# EAGLE board cpc_cpucard (EAGLE 6.4)
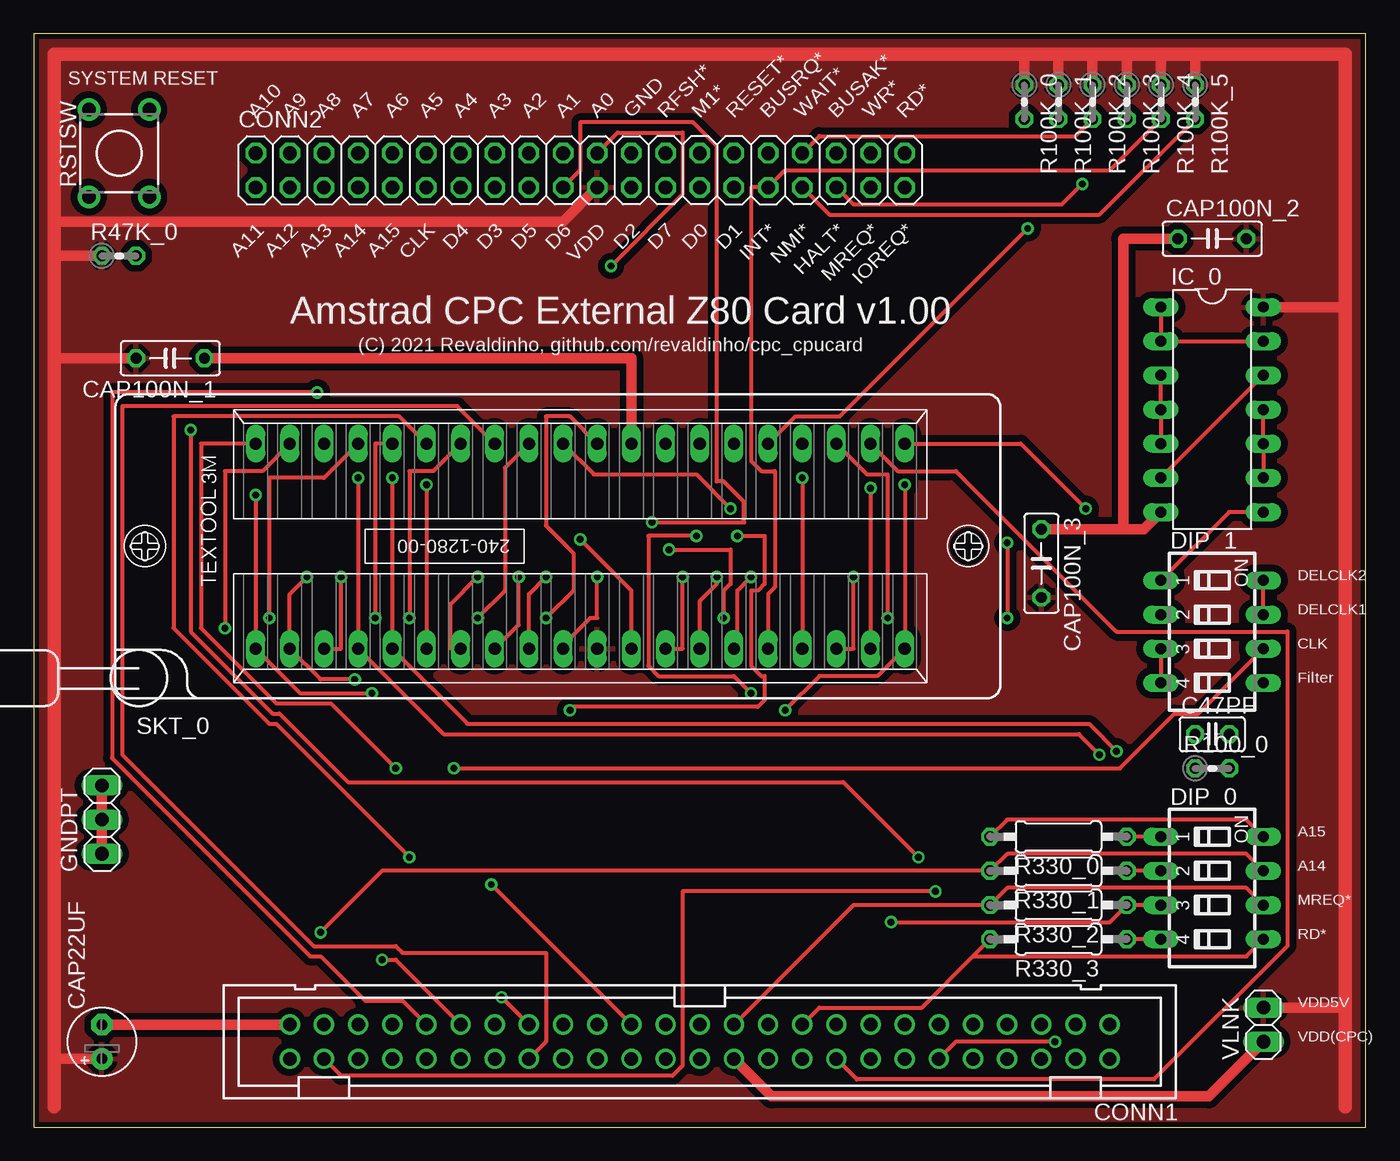
[diagram p0: board, top side]
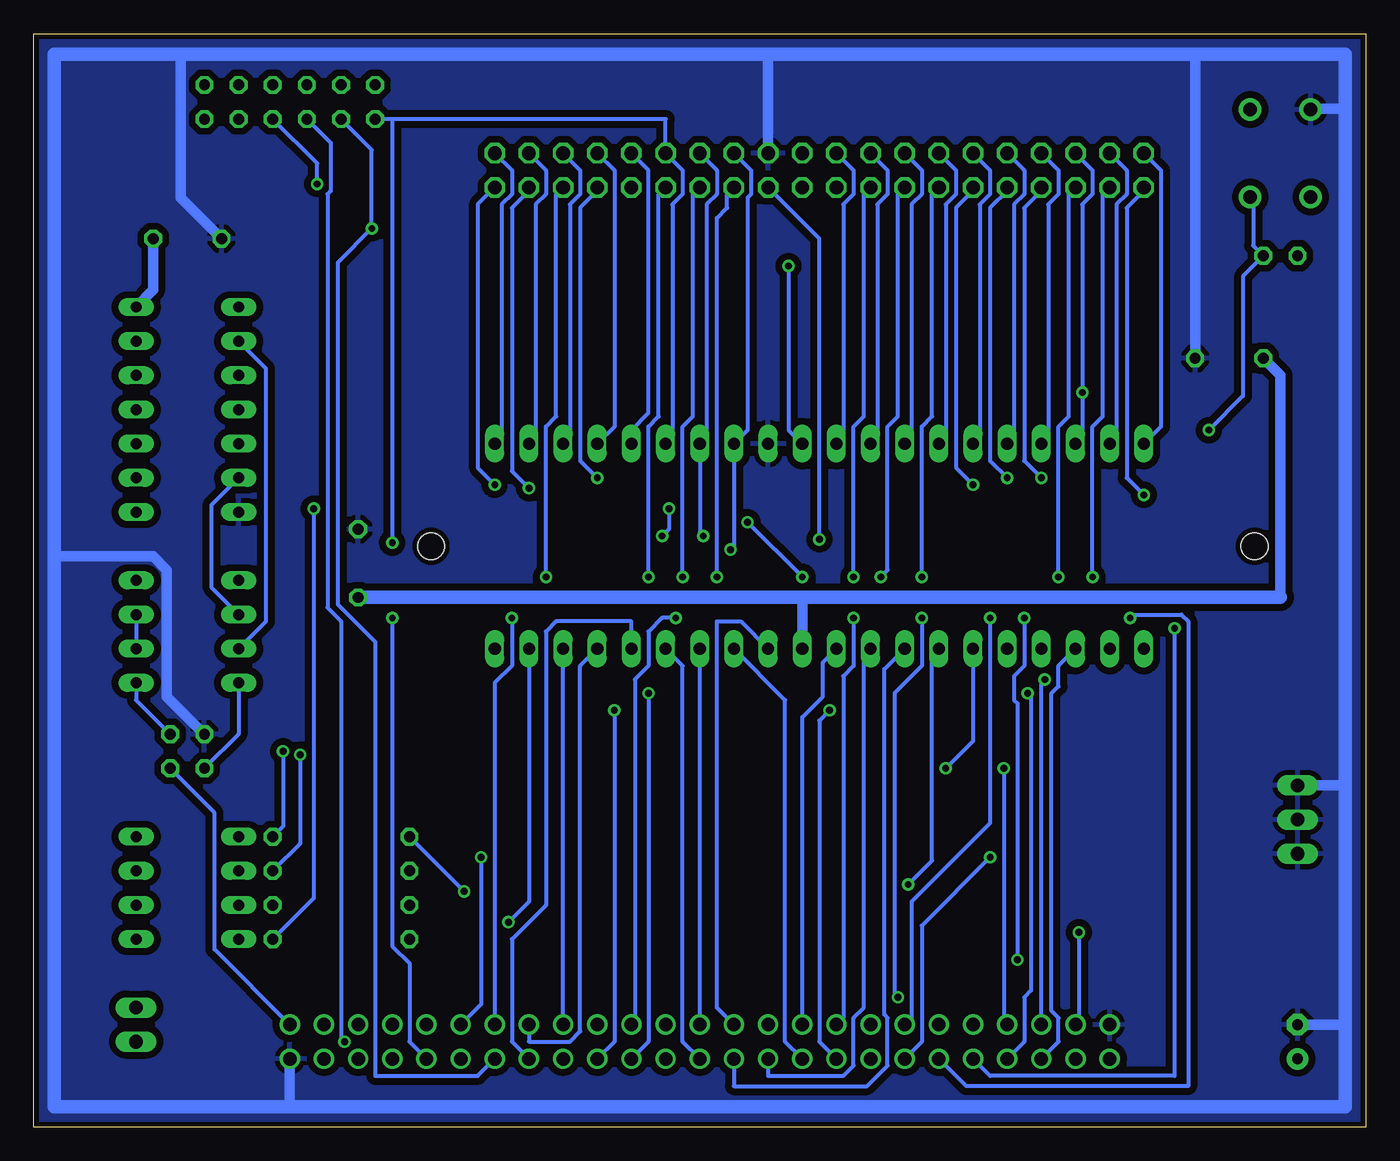
[diagram p1: board, bottom side, seen from below]

Size 99.06 x 81.28 mm. Coordinates in mm from the lower left corner, seen from the top.
Outline: 0,0 99.06,0 99.06,81.28 0,81.28 0,0
Copper layers (1*16): Top 0.035mm / dielectric 1.5mm / Bottom 0.035mm
Design rules "design_rules": minimum track width 10mil, minimum drill 20mil, track to track 10mil, track to pad 10mil, pad to pad 12mil, via to via 12mil, smd to smd 8mil, copper to edge 15mil, drill to drill 8mil, minimum pad ring 10mil, minimum via ring 8mil, stop-mask expansion 4mil, vias tented up to drill 0mil, thermal gap 15mil
Net classes: 0 signal: width 0.305 mm, clearance 0.305 mm; 1 supply: width 0.762 mm, clearance 0.508 mm

## Footprints (pad centres in the part's own frame; a part is rotated, then mirrored left to right if it is on the bottom)
C025-025X050 = drill 0.813 octagon: 1 -1.27,0; 2 1.27,0
E2,5-5 = drill 0.813 pad 1.6: + -1.27,0 | drill 0.813 pad 1.6 octagon: - 1.27,0
C050-025X075 = drill 0.813 octagon: 1 -2.54,0; 2 2.54,0
PAK100/2500-50 = drill 1 pad 1.422: 1 -30.48,-1.27; 2 -30.48,1.27; 3 -27.94,-1.27; 4 -27.94,1.27; 5 -25.4,-1.27; 6 -25.4,1.27; 7 -22.86,-1.27; 8 -22.86,1.27; 9 -20.32,-1.27; 10 -20.32,1.27; 11 -17.78,-1.27; 12 -17.78,1.27; 13 -15.24,-1.27; 14 -15.24,1.27; 15 -12.7,-1.27; 16 -12.7,1.27; 17 -10.16,-1.27; 18 -10.16,1.27; 19 -7.62,-1.27; 20 -7.62,1.27; 21 -5.08,-1.27; 22 -5.08,1.27; 23 -2.54,-1.27; 24 -2.54,1.27; 25 0,-1.27; 26 0,1.27; 27 2.54,-1.27; 28 2.54,1.27; 29 5.08,-1.27; 30 5.08,1.27; 31 7.62,-1.27; 32 7.62,1.27; 33 10.16,-1.27; 34 10.16,1.27; 35 12.7,-1.27; 36 12.7,1.27; 37 15.24,-1.27; 38 15.24,1.27; 39 17.78,-1.27; 40 17.78,1.27; 41 20.32,-1.27; 42 20.32,1.27; 43 22.86,-1.27; 44 22.86,1.27; 45 25.4,-1.27; 46 25.4,1.27; 47 27.94,-1.27; 48 27.94,1.27; 49 30.48,-1.27; 50 30.48,1.27
2X20 = drill 1.016 octagon: 1 -24.13,-1.27; 2 -24.13,1.27; 3 -21.59,-1.27; 4 -21.59,1.27; 5 -19.05,-1.27; 6 -19.05,1.27; 7 -16.51,-1.27; 8 -16.51,1.27; 9 -13.97,-1.27; 10 -13.97,1.27; 11 -11.43,-1.27; 12 -11.43,1.27; 13 -8.89,-1.27; 14 -8.89,1.27; 15 -6.35,-1.27; 16 -6.35,1.27; 17 -3.81,-1.27; 18 -3.81,1.27; 19 -1.27,-1.27; 20 -1.27,1.27; 21 1.27,-1.27; 22 1.27,1.27; 23 3.81,-1.27; 24 3.81,1.27; 25 6.35,-1.27; 26 6.35,1.27; 27 8.89,-1.27; 28 8.89,1.27; 29 11.43,-1.27; 30 11.43,1.27; 31 13.97,-1.27; 32 13.97,1.27; 33 16.51,-1.27; 34 16.51,1.27; 35 19.05,-1.27; 36 19.05,1.27; 37 21.59,-1.27; 38 21.59,1.27; 39 24.13,-1.27; 40 24.13,1.27
SD4-04 = drill 0.813 long: 1 -3.81,-3.81; 2 -1.27,-3.81; 3 1.27,-3.81; 4 3.81,-3.81; 5 3.81,3.81; 6 1.27,3.81; 7 -1.27,3.81; 8 -3.81,3.81
1X03 = drill 1.016 long: 1 -2.54,0; 2 0,0; 3 2.54,0
DIL14 = drill 0.813 long: 1 -7.62,-3.81; 2 -5.08,-3.81; 3 -2.54,-3.81; 4 0,-3.81; 5 2.54,-3.81; 6 5.08,-3.81; 7 7.62,-3.81; 8 7.62,3.81; 9 5.08,3.81; 10 2.54,3.81; 11 0,3.81; 12 -2.54,3.81; 13 -5.08,3.81; 14 -7.62,3.81
0204V = drill 0.813 octagon: 1 -1.27,0; 2 1.27,0
0207/10 = drill 0.813 octagon: 1 -5.08,0; 2 5.08,0
TL1105 = drill 1 pad 1.676: 1 -2.25,3.25; 2 2.25,3.25; 3 -2.25,-3.25; 4 2.25,-3.25
240-1280-00-0602J = drill 0.9 long: 1 -24.13,-7.62; 2 -21.59,-7.62; 3 -19.05,-7.62; 4 -16.51,-7.62; 5 -13.97,-7.62; 6 -11.43,-7.62; 7 -8.89,-7.62; 8 -6.35,-7.62; 9 -3.81,-7.62; 10 -1.27,-7.62; 11 1.27,-7.62; 12 3.81,-7.62; 13 6.35,-7.62; 14 8.89,-7.62; 15 11.43,-7.62; 16 13.97,-7.62; 17 16.51,-7.62; 18 19.05,-7.62; 19 21.59,-7.62; 20 24.13,-7.62; 21 24.13,7.62; 22 21.59,7.62; 23 19.05,7.62; 24 16.51,7.62; 25 13.97,7.62; 26 11.43,7.62; 27 8.89,7.62; 28 6.35,7.62; 29 3.81,7.62; 30 1.27,7.62; 31 -1.27,7.62; 32 -3.81,7.62; 33 -6.35,7.62; 34 -8.89,7.62; 35 -11.43,7.62; 36 -13.97,7.62; 37 -16.51,7.62; 38 -19.05,7.62; 39 -21.59,7.62; 40 -24.13,7.62 | hole 2: 28.86,0; -32.36,0
1X02 = drill 1.016 long: 1 -1.27,0; 2 1.27,0

## Placement (x,y rotation side)
C47PF  [C025-025X050]  87.63,29.21 0 top
CAP22UF  [E2,5-5]  5.08,6.35 90 top
CAP100N_1  [C050-025X075]  10.16,57.15 180 top
CAP100N_2  [C050-025X075]  87.63,66.04 0 top
CAP100N_3  [C050-025X075]  74.93,41.91 270 top
CONN1  [PAK100/2500-50]  49.53,6.35 180 top
CONN2  [2X20]  40.64,71.12 0 top
DIP_0  [SD4-04]  87.63,17.78 270 top
DIP_1  [SD4-04]  87.63,36.83 270 top
GNDPT  [1X03]  5.08,22.86 90 top
IC_0  [DIL14]  87.63,53.34 270 top
R47K_0  [0204V]  6.35,64.77 0 top
R100_0  [0204V]  87.63,26.67 0 top
R100K_0  [0204V]  73.66,76.2 270 top
R100K_1  [0204V]  76.2,76.2 270 top
R100K_2  [0204V]  78.74,76.2 270 top
R100K_3  [0204V]  81.28,76.2 270 top
R100K_4  [0204V]  83.82,76.2 270 top
R100K_5  [0204V]  86.36,76.2 270 top
R330_0  [0207/10]  76.2,21.59 180 top
R330_1  [0207/10]  76.2,19.05 180 top
R330_2  [0207/10]  76.2,16.51 180 top
R330_3  [0207/10]  76.2,13.97 180 top
RSTSW  [TL1105]  6.35,72.39 0 top
SKT_0  [240-1280-00-0602J]  40.64,43.18 0 top
VLNK  [1X02]  91.44,7.62 90 top

## Library data of the parts
C47PF CAP22UF CAP100N_1-CAP100N_3 R47K_0 R100_0 R100K_0 R100K_1-R100K_5 R330_0 R330_1-R330_3 = resistor
CONN1 SKT_0 = con-3m
CONN2 GNDPT VLNK = pinhead
DIP_0 DIP_1 = switch-dil
IC_0 = ic-package
RSTSW = switch

## Nets
A0: CONN1.33 CONN2.22 SKT_0.30
A1: CONN1.34 CONN2.20 SKT_0.31
A2: CONN1.35 CONN2.18 SKT_0.32
A3: CONN1.36 CONN2.16 SKT_0.33
A4: CONN1.37 CONN2.14 SKT_0.34
A5: CONN1.38 CONN2.12 SKT_0.35
A6: CONN1.39 CONN2.10 SKT_0.36
A7: CONN1.40 CONN2.8 SKT_0.37
A8: CONN1.41 CONN2.6 SKT_0.38
A9: CONN1.42 CONN2.4 SKT_0.39
A10: CONN1.43 CONN2.2 SKT_0.40
A11: CONN1.44 CONN2.1 SKT_0.1
A12: CONN1.45 CONN2.3 SKT_0.2
A13: CONN1.46 CONN2.5 SKT_0.3
A14: CONN1.47 DIP_0.7 R330_1.2
A15: CONN1.48 DIP_0.8 R330_0.2
BUSACK_B: CONN1.13 CONN2.36 SKT_0.23
BUSRESET_B: CONN1.11 R47K_0.2 RSTSW.4
BUSRQ_B: CONN1.14 CONN2.32 R100K_1.2 SKT_0.25
CLK: CONN1.1 R100_0.2
CLK1: DIP_1.2 IC_0.6 IC_0.12
CLK2_B: IC_0.9 IC_0.10 IC_0.11
CLK3: DIP_1.1 IC_0.8
CLK_B: IC_0.3 IC_0.4 IC_0.5
CLK_CAP: C47PF.2 DIP_1.5
CLK_FILT: DIP_1.3 DIP_1.4 IC_0.1 IC_0.2 IC_0.13 R100_0.1
CURSOR: CONN1.5
D0: CONN1.25 CONN2.27 SKT_0.14
D1: CONN1.26 CONN2.29 SKT_0.15
D2: CONN1.27 CONN2.23 SKT_0.12
D3: CONN1.28 CONN2.15 SKT_0.8
D4: CONN1.29 CONN2.13 SKT_0.7
D5: CONN1.30 CONN2.17 SKT_0.9
D6: CONN1.31 CONN2.19 SKT_0.10
D7: CONN1.32 CONN2.25 SKT_0.13
EXP_B: CONN1.3
GND [supply]: C47PF.1 CAP22UF.- CAP100N_1.1 CAP100N_2.1 CAP100N_3.1 CONN1.2 CONN1.49 CONN2.24 GNDPT.1 GNDPT.2 GNDPT.3 IC_0.7 RSTSW.1 SKT_0.29
HALT_B: CONN1.17 CONN2.35 R100K_3.2 SKT_0.18
INT_B: CONN1.16 CONN2.31 R100K_4.2 SKT_0.16
IOREQ_B: CONN1.20 CONN2.39 SKT_0.20
LPEN: CONN1.4
M1_B: CONN1.22 CONN2.28 SKT_0.27
MREQ_B: CONN1.23 DIP_0.6 R330_2.2
NMI_B: CONN1.15 CONN2.33 R100K_5.2 SKT_0.17
RAMDIS: CONN1.6
RAMRD_B: CONN1.7
RD_B: CONN1.19 DIP_0.5 R330_3.2
READY: CONN1.12 CONN2.34 R100K_2.2 SKT_0.24
RESET_B: CONN1.10 CONN2.30 R100K_0.2 SKT_0.26
RFSH_B: CONN1.21 CONN2.26 SKT_0.28
ROMDIS: CONN1.8
ROMEN_B: CONN1.9
SOUND: CONN1.50
VDD [supply]: CONN1.24 VLNK.1
VDD5V [supply]: CAP22UF.+ CAP100N_1.2 CAP100N_2.2 CAP100N_3.2 CONN2.21 IC_0.14 R47K_0.1 R100K_0.1 R100K_1.1 R100K_2.1 R100K_3.1 R100K_4.1 R100K_5.1 SKT_0.11 VLNK.2
WR_B: CONN1.18 CONN2.38 SKT_0.22
ZIF_A14: CONN2.7 DIP_0.2 R330_1.1 SKT_0.4
ZIF_A15: CONN2.9 DIP_0.1 R330_0.1 SKT_0.5
ZIF_CLK: CONN2.11 DIP_1.6 DIP_1.7 DIP_1.8 SKT_0.6
ZIF_MREQ_B: CONN2.37 DIP_0.3 R330_2.1 SKT_0.19
ZIF_RD_B: CONN2.40 DIP_0.4 R330_3.1 SKT_0.21

## Tracks (layer width: path | path; a pad name or v marks a point on that pad's centre or on a via)
A0  (via drill 0.51)
  Top 0.305: v42.93,64.01 48.26,69.34 48.26,73.91 43.43,73.91 CONN2.22 | v38.1,37.85 40.13,39.88 40.13,42.67 38.1,44.7 38.1,52.83 39.88,52.83 SKT_0.30
  Bottom 0.305: SKT_0.30 42.93,51.82 v42.93,64.01 | CONN1.33 38.86,8.13 38.86,33.53 38.1,34.29 v38.1,37.85
A1  (via drill 0.51)
  Top 0.305: v39.88,30.99 40.13,31.24 53.85,31.24 54.36,31.75 54.36,33.53 54.1,33.53 53.34,34.29 53.34,39.88 53.85,39.88 54.36,40.39 54.36,43.94 v52.32,43.94 | v51.82,45.97 49.28,48.51 41.66,48.51 SKT_0.31
  Bottom 0.305: SKT_0.31 38.86,51.31 38.86,68.58 38.1,69.34 38.1,71.12 CONN2.20 | CONN1.34 40.64,6.35 40.64,30.23 v39.88,30.99 | v52.32,43.94 51.82,44.45 v51.82,45.97
A2  (via drill 0.51)
  Top 0.305: v34.8,9.65 CONN1.35 | v33.02,37.85 35.05,39.88 35.05,49.02 SKT_0.32
  Bottom 0.305: SKT_0.32 36.32,51.31 36.32,68.58 35.56,69.34 35.56,71.12 CONN2.18 | v34.8,9.65 35.05,9.91 35.05,32.26 33.02,34.29 v33.02,37.85
A3
  Top 0.305: CONN1.36 38.1,6.35 38.1,12.95 27.43,12.95 26.92,13.46 20.83,13.46 6.6,27.69 6.6,53.59 31.5,53.59 SKT_0.33
  Bottom 0.305: SKT_0.33 33.78,51.31 33.78,68.58 33.02,69.34 33.02,71.12 CONN2.16
A4  (via drill 0.51)
  Top 0.305: v27.94,37.85 27.94,48.77 29.72,48.77 SKT_0.34
  Bottom 0.305: SKT_0.34 31.24,51.31 31.24,68.58 30.48,69.34 30.48,71.12 CONN2.14 | CONN1.37 33.78,8.13 33.78,16.76 27.94,22.61 v27.94,37.85
A5  (via drill 0.51)
  Top 0.305: v27.94,20.07 18.03,29.97 17.53,29.97 10.41,37.08 10.41,52.83 27.18,52.83 SKT_0.35
  Bottom 0.305: SKT_0.35 28.7,51.31 28.7,68.58 27.94,69.34 27.94,71.12 CONN2.12 | CONN1.38 33.02,6.35 33.02,14.99 v27.94,20.07
A6  (via drill 0.51)
  Top 0.305: CONN1.39 26.92,12.45 v25.91,12.45 | v25.4,37.85 25.4,50.8 SKT_0.36
  Bottom 0.305: SKT_0.36 26.16,51.31 26.16,68.58 25.4,69.34 25.4,71.12 CONN2.10 | v25.91,12.45 25.91,31.5 26.16,31.75 26.16,33.53 25.4,34.29 v25.4,37.85
A7  (via drill 0.51)
  Top 0.305: v17.53,37.85 17.53,48.26 21.59,48.26 SKT_0.37
  Bottom 0.305: SKT_0.37 23.62,51.31 23.62,68.58 22.86,69.34 22.86,71.12 CONN2.8 | CONN1.40 29.72,3.05 13.21,3.05 13.21,37.59 13.72,38.1 17.53,38.1 v17.53,37.85
A8  (via drill 0.51)
  Top 0.305: CONN1.41 27.43,9.4 24.64,9.4 21.34,12.7 20.57,12.7 5.84,27.43 5.84,54.61 v21.08,54.61
  Bottom 0.305: SKT_0.38 21.08,51.31 v21.08,54.61 21.08,68.58 20.32,69.34 20.32,71.12 CONN2.6
A9  (via drill 0.51)
  Top 0.305: v14.22,37.08 14.22,48.77 17.02,48.77 SKT_0.39
  Bottom 0.305: SKT_0.39 18.54,51.31 18.54,68.58 17.78,69.34 17.78,71.12 CONN2.4 | CONN1.42 27.94,3.81 14.22,3.81 v14.22,37.08
A10  (via drill 0.51)
  Top 0.305: v26.92,26.67 22.1,31.5 18.03,31.5 12.45,37.08 12.45,50.8 SKT_0.40
  Bottom 0.305: SKT_0.40 15.24,52.07 15.24,71.12 CONN2.2 | CONN1.43 26.92,7.87 v26.92,26.67
A11  (via drill 0.51)
  Top 0.305: v16.51,46.99 SKT_0.1 19.81,32.26 v25.15,32.26
  Bottom 0.305: v16.51,46.99 17.78,48.26 17.78,68.33 16.51,69.6 CONN2.1 | CONN1.44 25.4,6.35 25.4,9.65 24.89,10.16 24.89,32 v25.15,32.26
A12  (via drill 0.51)
  Top 0.305: v23.88,33.27 21.34,33.27 SKT_0.2 19.05,39.62 v20.32,40.89
  Bottom 0.305: v23.88,33.27 24.13,33.02 CONN1.45 | CONN2.3 19.56,69.34 19.56,52.83 20.32,52.07 v20.32,40.89
A13  (via drill 0.51)
  Top 0.305: v22.86,40.89 22.86,35.56 SKT_0.3
  Bottom 0.305: SKT_0.3 22.86,34.29 22.86,32.77 23.37,32.26 23.37,8.64 22.86,8.13 22.86,6.35 CONN1.46 | CONN2.5 22.1,69.34 22.1,52.83 22.86,52.07 v22.86,40.89
A14  (via drill 0.51)
  Top 0.305: DIP_0.7 90.17,20.32 72.39,20.32 R330_1.2 25.91,19.05 v21.34,14.48
  Bottom 0.305: CONN1.47 21.34,7.87 v21.34,14.48
A15  (via drill 0.51)
  Top 0.305: R330_0.2 72.39,22.86 90.17,22.86 DIP_0.8 | CONN1.48 22.86,3.81 47.5,3.81 48.26,4.57 48.26,17.53 v67.06,17.53
  Bottom 0.305: R330_0.2 v67.06,17.53
BUSACK_B  (via drill 0.51)
  Top 0.305: v63.5,37.85 63.5,48.51 61.98,48.51 SKT_0.23
  Bottom 0.305: SKT_0.23 59.18,51.31 59.18,68.58 58.42,69.34 58.42,71.12 CONN2.36 | CONN1.13 64.77,33.02 63.5,34.29 v63.5,37.85
BUSRESET_B  (via drill 0.51)
  Top 0.305: v65.79,20.07 60.2,25.65 23.37,25.65 18.29,30.73 17.78,30.73 11.68,36.83 v11.68,51.82
  Bottom 0.305: RSTSW.4 8.38,69.09 8.38,65.53 R47K_0.2 9.14,63.25 9.14,54.36 v11.68,51.82 | CONN1.11 65.79,9.14 v65.79,20.07
BUSRQ_B  (via drill 0.51)
  Top 0.305: v73.91,66.8 59.94,52.83 56.64,52.83 SKT_0.25
  Bottom 0.305: R100K_1.2 73.91,72.64 v73.91,66.8 76.45,64.26 76.45,38.86 73.66,36.07 73.66,3.81 66.04,3.81 CONN1.14 | CONN2.32 53.34,71.12 53.34,53.09 54.61,51.82 SKT_0.25
CLK
  Bottom 0.305: R100_0.2 85.6,23.37 85.6,13.21 CONN1.1
CLK1
  Top 0.305: IC_0.6 IC_0.12
  Bottom 0.305: DIP_1.2 85.85,40.13 85.85,46.23 IC_0.6
CLK2_B
  Top 0.305: IC_0.9 IC_0.10 IC_0.11
CLK3
  Top 0.305: DIP_1.1 88.9,45.72 IC_0.8
CLK_B
  Top 0.305: IC_0.5 IC_0.4 IC_0.3
CLK_CAP
  Bottom 0.305: C47PF.2 91.44,31.75 DIP_1.5
CLK_FILT
  Top 0.305: IC_0.1 IC_0.2 IC_0.13 | DIP_1.3 DIP_1.4
  Bottom 0.305: R100_0.1 83.82,29.21 DIP_1.4 | IC_0.2 81.79,56.39 81.79,37.59 DIP_1.3
D0  (via drill 0.51)
  Top 0.305: v50.8,40.89 50.8,40.39 49.53,39.12 SKT_0.14
  Bottom 0.305: CONN1.25 SKT_0.14 | CONN2.27 50.04,69.34 50.04,52.83 50.8,52.07 v50.8,40.89
D1  (via drill 0.51)
  Top 0.305: v53.34,40.89 52.32,39.88 52.32,35.56 SKT_0.15
  Bottom 0.305: SKT_0.15 50.8,34.29 50.8,6.35 CONN1.26 | CONN2.29 52.58,69.34 52.58,52.83 53.34,52.07 v53.34,40.89
D2  (via drill 0.51)
  Top 0.305: v40.64,43.69 44.45,39.88 SKT_0.12
  Bottom 0.305: SKT_0.12 46.48,37.59 48.26,37.59 48.26,8.89 CONN1.27 | CONN2.23 40.64,66.04 v40.64,43.69
D3  (via drill 0.51)
  Top 0.305: v36.07,40.89 36.07,37.34 SKT_0.8
  Bottom 0.305: SKT_0.8 35.81,34.04 35.81,8.38 35.56,8.13 35.56,4.57 37.08,3.05 46.99,3.05 CONN1.28 | CONN2.15 34.8,69.34 34.8,52.83 35.56,52.07 35.56,41.4 v36.07,40.89
D4  (via drill 0.51)
  Top 0.305: CONN1.29 v34.04,18.03 | v33.02,40.89 30.99,38.86 30.99,35.56 SKT_0.7
  Bottom 0.305: SKT_0.7 32.26,35.05 32.26,19.81 v34.04,18.03 | CONN2.13 32.26,69.34 32.26,52.83 33.02,52.07 v33.02,40.89
D5  (via drill 0.51)
  Top 0.305: v38.1,40.89 36.83,39.62 SKT_0.9
  Bottom 0.305: SKT_0.9 37.34,35.05 37.34,8.89 38.1,8.13 38.1,4.57 38.86,3.81 44.45,3.81 CONN1.30 | CONN2.17 37.34,69.34 37.34,52.83 38.1,52.07 v38.1,40.89
D6  (via drill 0.51)
  Top 0.305: CONN2.19 40.64,71.12 40.64,74.68 49.02,74.68 50.8,72.9 50.8,48.01 51.31,48.01 52.83,46.48 52.83,44.96 v45.97,44.96 | v41.91,40.89 41.91,37.85 41.4,37.85 39.37,35.81 SKT_0.10
  Bottom 0.305: SKT_0.10 40.39,34.54 40.39,32 41.91,30.48 CONN1.31 | v41.91,40.89 v45.97,44.96
D7  (via drill 0.51)
  Top 0.305: v48.26,40.89 48.26,35.56 SKT_0.13
  Bottom 0.305: SKT_0.13 43.18,31.75 43.18,6.35 CONN1.32 | CONN2.25 47.5,69.34 47.5,68.33 48.26,67.56 v48.26,40.89
GND
  Top 0.762: CAP22UF.- CONN1.49 | 81.03,44.45 82.55,44.45 IC_0.7 | 81.03,44.45 CAP100N_3.1 | GNDPT.1 GNDPT.2 GNDPT.3 | SKT_0.29 44.45,57.15 CAP100N_1.1 | 81.03,44.45 81.03,66.04 CAP100N_2.1
  Bottom 0.762: 12.7,79.76 CAP100N_1.1 | CAP100N_2.1 88.14,69.09 88.14,79.76 | C47PF.1 89.15,32 89.15,41.4 90.17,42.42 97.54,42.42 | 80.01,1.52 CONN1.2 | 44.45,79.76 CONN2.24 | 1.52,75.69 4.06,75.69 RSTSW.1 | 1.52,25.4 GNDPT.3 | 1.52,7.62 CAP22UF.-
  Bottom 1.016: 1.52,1.52 80.01,1.52 97.54,1.52 97.54,42.42 97.54,79.76 88.14,79.76 44.45,79.76 12.7,79.76 1.52,79.76 1.52,75.69 1.52,25.4 1.52,7.62 1.52,1.52
  pour Bottom (isolate 0.381): 0,0 0,81.28 99.06,81.28 99.06,0
HALT_B  (via drill 0.51)
  Top 0.305: v77.98,70.1 76.45,68.58 60.96,68.58 CONN2.35 | v60.96,40.89 60.96,35.56 SKT_0.18
  Bottom 0.305: R100K_3.2 77.98,71.63 v77.98,70.1 | CONN1.17 SKT_0.18 | CONN2.35 60.2,69.34 60.2,52.83 60.96,52.07 v60.96,40.89
INT_B
  Top 0.305: R100K_4.2 80.01,71.12 55.88,71.12 CONN2.31 53.34,69.85 53.34,49.53 54.1,48.77 55.12,48.77 55.12,40.13 54.61,39.62 SKT_0.16
  Bottom 0.305: CONN1.16 63.5,6.35 63.5,13.97 60.96,16.51 60.96,36.83 60.2,37.59 54.61,37.59 SKT_0.16
IOREQ_B  (via drill 0.51)
  Top 0.305: v64.77,47.75 SKT_0.20 62.74,33.53 58.42,33.53 v55.88,30.99
  Bottom 0.305: v64.77,47.75 66.04,49.02 66.04,68.58 CONN2.39 | CONN1.20 55.88,6.35 v55.88,30.99
M1_B  (via drill 0.51)
  Top 0.305: v53.34,32.26 52.07,33.53 46.48,33.53 45.72,34.29 45.72,43.94 v49.28,43.94
  Bottom 0.305: CONN2.28 48.26,71.12 48.26,69.34 49.02,68.58 49.02,51.31 SKT_0.27 49.53,44.2 v49.28,43.94 | CONN1.22 53.34,6.35 v53.34,32.26
MREQ_B
  Top 0.305: DIP_0.6 90.17,17.78 72.39,17.78 R330_2.2 60.96,16.51 CONN1.23
NMI_B  (via drill 0.51)
  Top 0.305: R100K_5.2 79.25,67.82 59.18,67.82 CONN2.33 | v57.15,48.26 SKT_0.17
  Bottom 0.305: SKT_0.17 58.42,34.29 58.42,7.11 59.18,6.35 62.23,6.35 CONN1.15 | v57.15,48.26 58.42,49.53 58.42,68.33 57.15,69.6 CONN2.33
RD_B
  Top 0.305: 69.85,12.7 66.04,8.89 58.42,8.89 CONN1.19 | 69.85,12.7 R330_3.2 | DIP_0.5 90.17,12.7 69.85,12.7
READY  (via drill 0.51)
  Top 0.305: R100K_2.2 77.47,73.66 58.42,73.66 CONN2.34 | CONN1.12 68.58,6.35 v75.95,6.35
  Bottom 0.305: SKT_0.24 55.88,52.07 55.88,71.12 CONN2.34 | v75.95,6.35 76.2,6.6 76.2,37.59 77.22,38.61 77.22,69.34 76.96,69.6 76.96,73.15 R100K_2.2
RESET_B  (via drill 0.51)
  Top 0.305: v72.39,43.43 v72.39,37.85
  Bottom 0.305: 72.39,74.93 52.07,74.93 CONN2.30 50.8,71.12 50.8,69.34 51.56,68.58 51.56,51.31 SKT_0.26 | 72.39,74.93 R100K_0.2 | CONN1.10 71.12,6.35 71.12,12.19 72.39,13.46 v72.39,37.85 | 72.39,74.93 v72.39,43.43
RFSH_B  (via drill 0.51)
  Top 0.305: v51.31,37.85 51.31,39.88 51.82,40.39 51.82,42.93 v47.24,42.93
  Bottom 0.305: CONN2.26 45.72,71.12 45.72,69.34 45.97,69.09 45.97,51.82 SKT_0.28 46.99,43.18 v47.24,42.93 | CONN1.21 54.36,7.87 54.36,33.27 53.34,34.29 53.34,36.83 52.32,37.85 v51.31,37.85
VDD
  Top 0.762: CONN1.24 54.86,2.29 87.38,2.29 VLNK.1
VDD5V
  Top 0.762: 1.52,57.15 CAP100N_1.2 | 1.52,64.77 R47K_0.1 | 73.66,79.76 R100K_0.1 | 76.2,79.76 R100K_1.1 | 78.74,79.76 R100K_2.1 | 81.28,79.76 R100K_3.1 | 83.82,79.76 R100K_4.1 | 86.36,79.76 R100K_5.1 | 97.54,8.89 VLNK.2 | CONN2.21 39.37,67.31 1.52,67.31 | 1.52,5.08 CAP22UF.+ | 97.54,60.96 IC_0.14
  Top 1.016: 97.54,1.52 97.54,8.89 97.54,60.96 97.54,79.76 86.36,79.76 83.82,79.76 81.28,79.76 78.74,79.76 76.2,79.76 73.66,79.76 1.52,79.76 1.52,67.31 1.52,64.77 1.52,57.15 1.52,5.08 1.52,1.52
  Bottom 0.762: IC_0.14 90.17,62.23 CAP100N_2.2 | 41.91,39.37 SKT_0.11 | 6.35,39.37 6.35,55.88 CAP100N_1.2
  Bottom 1.016: 6.35,39.37 41.91,39.37 CAP100N_3.2
  pour Top (isolate 0.381): 0,0 0,81.28 99.06,81.28 99.06,0
WR_B
  Top 0.305: CONN1.18 61.21,3.56 83.31,3.56 93.22,13.46 93.22,36.83 80.52,36.83 68.58,48.77 64.26,48.77 SKT_0.22
  Bottom 0.305: SKT_0.22 61.72,51.31 61.72,68.58 60.96,69.34 60.96,71.12 CONN2.38
ZIF_A14  (via drill 0.51)
  Top 0.305: DIP_0.2 R330_1.1 | v24.13,48.26 SKT_0.4 30.48,29.21 77.72,29.21 v79.25,27.69
  Bottom 0.305: v24.13,48.26 25.4,49.53 25.4,68.33 24.13,69.6 CONN2.7 | R330_1.1 79.25,21.08 v79.25,27.69
ZIF_A15  (via drill 0.51)
  Top 0.305: DIP_0.1 R330_0.1 | v26.67,48.26 SKT_0.5 32.26,29.97 78.49,29.97 v80.52,27.94
  Bottom 0.305: v26.67,48.26 27.94,49.53 27.94,68.33 26.67,69.6 CONN2.9 | R330_0.1 80.52,22.35 v80.52,27.94
ZIF_CLK  (via drill 0.51)
  Top 0.305: DIP_1.7 DIP_1.8 | v29.21,47.75 SKT_0.6 | DIP_1.6 86.61,30.73 84.84,30.73 80.77,26.67 v31.24,26.67
  Bottom 0.305: DIP_1.7 DIP_1.6 | v29.21,47.75 30.48,49.02 30.48,68.33 29.21,69.6 CONN2.11 | v31.24,26.67 29.21,28.7 SKT_0.6
ZIF_MREQ_B  (via drill 0.51)
  Top 0.305: DIP_0.3 R330_2.1 80.01,15.24 v63.75,15.24 | v62.23,47.5 SKT_0.19
  Bottom 0.305: v62.23,47.5 63.5,48.77 63.5,68.33 62.23,69.6 CONN2.37 | v63.75,15.24 62.23,16.76 SKT_0.19
ZIF_RD_B  (via drill 0.51)
  Top 0.305: DIP_0.4 R330_3.1 | v78.23,45.97 73.41,50.8 SKT_0.21
  Bottom 0.305: SKT_0.21 64.26,51.31 64.26,68.58 63.5,69.34 63.5,71.12 CONN2.40 | R330_3.1 78.23,17.02 v78.23,45.97

## Text on the board
tPlace: SYSTEM RESET | A10 | A9 | A8 | A7 | A6 | A5 | A4 | A3 | A2 | A1 | A0 | GND | RFSH* | M1* | RESET* | BUSRQ* | WAIT* | BUSAK* | WR* | RD* | A11 | A12 | A13 | A14 | A15 | CLK | D4 | D3 | D5 | D6 | VDD | D2 | D7 | D0 | D1 | INT* | NMI* | HALT* | MREQ* | IOREQ* | Amstrad CPC External Z80 Card v1.00 | (C) 2021 Revaldinho, github.com/revaldinho/cpc_cpucard | DELCLK2 | DELCLK1 | CLK | Filter | A15 | A14 | MREQ* | RD* | VDD5V | VDD(CPC)